# Altium PCB PCB1.PcbDoc
Units mm, origin at the board's own origin, x right, y up, seen from the top; angles counter-clockwise.
Board outline 99.82 x 81.91 mm, 2 copper layers (Top Layer, Bottom Layer); 32 components, 25 nets, 119 pads, 29 vias.
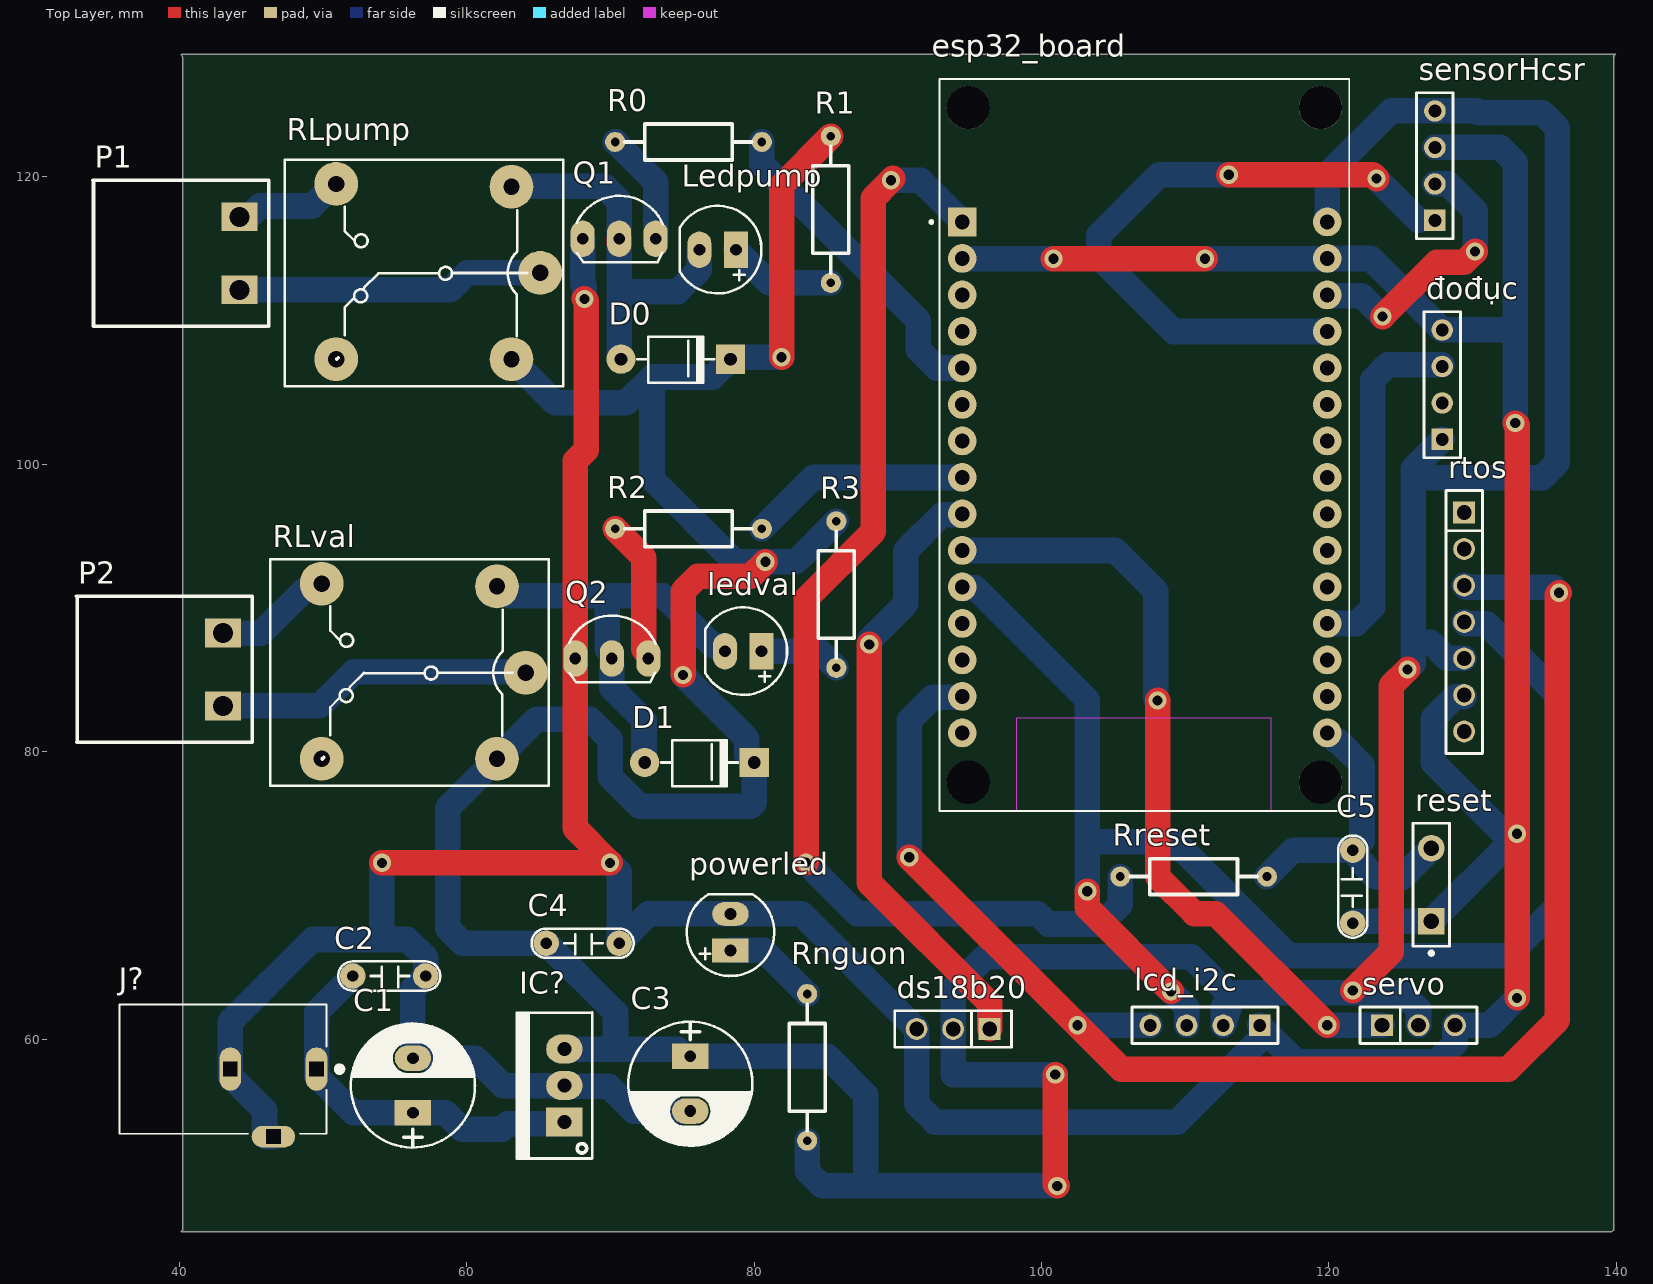
[diagram p0: Top Layer view]
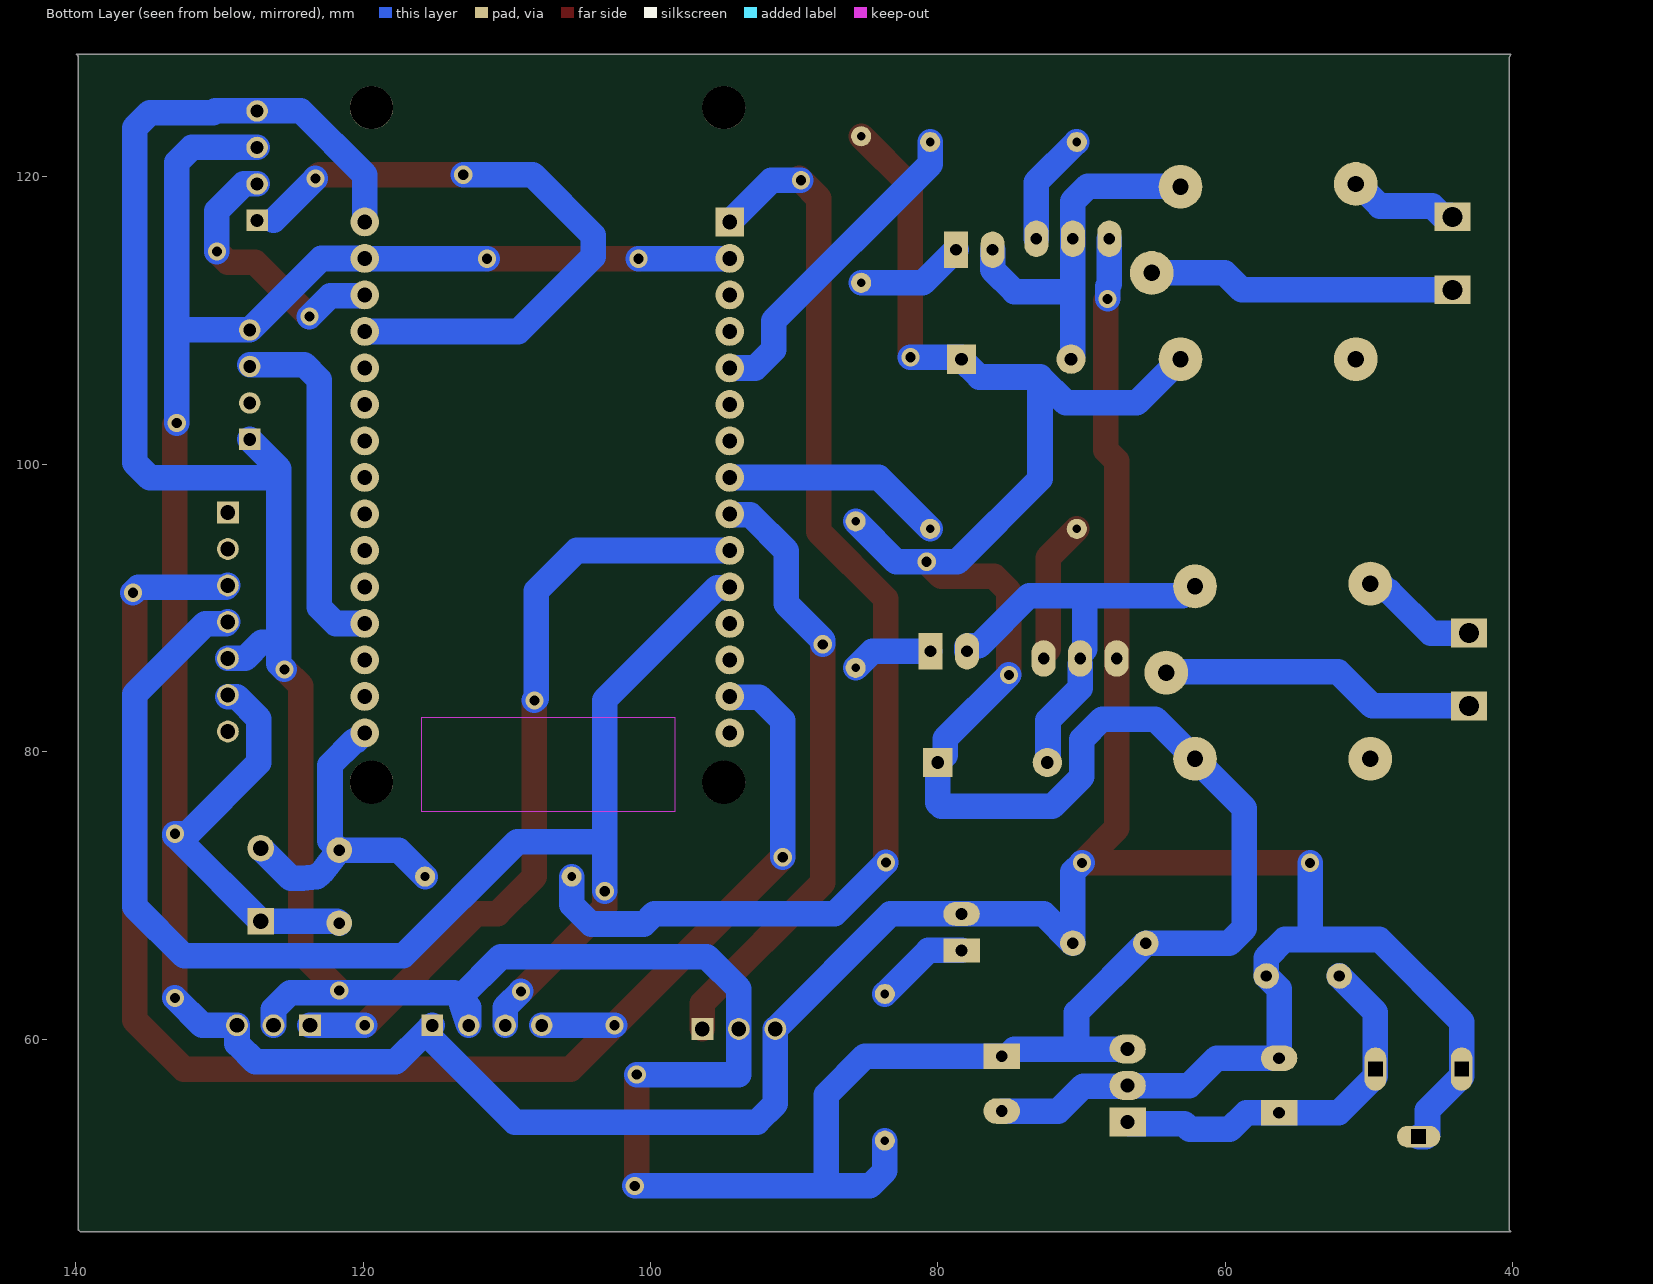
[diagram p1: Bottom Layer view, seen from below]

## Layer stack, top to bottom
Top Solder: solder mask 0.0102, Solder Resist, Dk 3.5
Top Layer: signal copper 0.0356
Dielectric 1: dielectric 0.32, FR-4, Dk 4.8
Bottom Layer: signal copper 0.0356
Bottom Solder: solder mask 0.0102, Solder Resist, Dk 3.5

## Board outline
40.259,128.27 40.259,46.736 40.132,46.609 139.7,46.609 139.827,46.736 139.827,128.397 139.954,128.524 40.132,128.524

## Design rules (kind name [scope] priority, off if disabled: settings)
Clearance [All] p1: gap=0.5 ignorepadtopadclearanceinfootprint=FALSE
PolygonConnect [All] p1: connectstyle=Relief reliefconductorwidth=0.254 reliefentries=4 polygonreliefangle="90 Angle" airgapwidth=0.254
RoutingVias [All] p1: holewidth=0.711 width=1.27 viastyle="Through Hole" minholewidth=0.711 minwidth=1.27 maxholewidth=0.711 maxwidth=1.27
SolderMaskExpansion [All] p1: expansion=0.102 istentingtop=FALSE
Width [All] p1: maxlimit=2.032 minlimit=1.524 preferedwidth=1.778 minimp=50.000000 maximp=50.000000 favimp=50.000000
30 further rules are at their usual default settings.

## Components (designator, comment, footprint, x,y, rotation, side; value= is the part's Value field where it differs from the comment)
C1 "1000uF/16V" CP1.5/3.4 56.261,54.864 r90 top
C2 "104" CN2 57.15,64.389 r180 top value=0.1uF
C3 "1000uF/16V" CP1.5/3.4 75.565,58.801 r270 top
C4 "104" CN2 70.612,66.675 r180 top value=0.1uF
C5 "104" CN2 121.666,68.072 r90 top value=0.1uF
D0 "100v" "DIODE 1A" 69.469,107.315 r180 top
D1 "100v" "DIODE 1A" 71.12,79.248 r180 top
ds18b20 "JP3" JP3-C1T 96.393,60.706 r180 top
esp32_board "ESP32-DEVKIT-V1" MODULE_ESP32_DEVKIT_V1 107.188,101.346 r0 top
IC? "LM7805" QTO-220 66.802,54.229 r90 top
J? "PJ-102A" CUI_PJ-102A 43.053,57.912 r180 top
lcd_i2c "Header 4" HDR1X4 115.189,60.96 r180 top
Ledpump "LED 5mm" LED-5MM-RED 78.74,114.935 r180 top
ledval "LED 5mm" LED-5MM-RED 80.518,86.995 r180 top
P1 "CON 2 EDG5.08" "CON 2 2EDG5.08" 44.196,112.141 r90 top
P2 "CON 2 EDG5.08" "CON 2 2EDG5.08" 43.053,83.185 r90 top
powerled "LED 5mm" LED-5MM-RED 78.359,66.167 r90 top
Q1 "C1815" TO92 70.612,115.697 r0 top value=C9014
Q2 "C1815" TO92 70.104,86.487 r0 top value=C9014
R0 "10K" "tro vach 1/4w" 75.438,122.428 r180 top
R1 "330" "tro vach 1/4w" 85.344,117.729 r270 top
R2 "10K" "tro vach 1/4w" 75.438,95.504 r180 top
R3 "330" "tro vach 1/4w" 85.725,90.932 r270 top
reset "SW-PB" SPST-2 127.127,70.739 r90 top
RLpump "Relay" "Relay 5 Chan SRD" 65.119,113.315 r180 top
RLval "Relay" "Relay 5 Chan SRD" 64.111,85.502 r180 top
Rnguon "220R" "tro vach 1/4w" 83.693,58.039 r270 top
Rreset "10k" "tro vach 1/4w" 110.593,71.311 r0 top
rtos "JP7" JP7-C1T 129.413,96.647 r270 top
sensorHcsr "Header 4" HDR1X4 127.381,116.967 r90 top
servo "JP3" JP3-C1T 123.698,60.96 r0 top
đođục "Header 4" HDR1X4 127.889,101.727 r90 top

## Footprints (in the part's own frame and the unit in brackets; to place one, negate y for a bottom-side part, rotate by r counter-clockwise, add the part's x,y. Pads: shape width x height; smd on the part's side, far side on the other; paste and mask are expansions set on the pad)
CN2 [mil]
  round 70 hole 31: 1(0,0) 2(200,0)
  silkscreen extent -40,-40 240,40, body extent -54,-44 260,55, height 407
"CON 2 2EDG5.08" [mm]
  rect 2x2.5 hole 1.4: 1(0,0) 2(5.08,0)
  silkscreen extent -2.54,-2.03 7.62,10.21, body extent -2.5,-1.75 7.58,10.25, height 3.15
CP1.5/3.4 [mil] "Tu hoa 220->470uF,16V, 470uF/16V,25V"
  rect 70x100 hole 32: 1(0,0)
  oval 70x100 hole 32: 2(150,0)
  silkscreen extent -95,-170 245,170, body extent -85,-157 230,157, height 446
CUI_PJ-102A [mm]
  oval 1.508x3.016 hole 1 square: 1(-6.5,0) 2(-0.5,0)
  oval 3.016x1.508 hole 1 square: 3(-3.5,4.7)
  silkscreen extent -8.3,-4.5 7.2,4.5, body extent -7.2,-4.5 7.2,4.9, height 11
"DIODE 1A" [mil] "Diode 1A"
  round 80 hole 35: 1(-50,0)
  rect 80x80 hole 35: 2(-350,0)
  silkscreen extent -305,-61 -95,65, body extent -366,-61 -34,65, height 122
HDR1X4 [mm] "Connector; Header; 4 Position"
  rect 1.5x1.5 hole 0.9: 1(0,0)
  round 1.5 hole 0.9: 2(2.54,0) 3(5.08,0) 4(7.62,0)
  silkscreen extent -1.27,-1.27 8.89,1.27
JP3-C1T [mm] "3 row, straight, gold plating"
  rect 1.52x1.52 hole 1.02: 1(0,0)
  round 1.52 hole 1.02: 2(2.54,0) 3(5.08,0)
  silkscreen extent -1.52,-1.27 6.6,1.27, body extent -1.52,-1.25 6.6,1.25, height 8.51
JP7-C1T [mm] "7 row, straight, gold plating"
  rect 1.52x1.52 hole 1.02: 1(0,0)
  round 1.52 hole 1.02: 2(2.54,0) 3(5.08,0) 4(7.62,0) 5(10.16,0) 6(12.7,0) 7(15.24,0)
  silkscreen extent -1.52,-1.27 16.76,1.27, body extent -1.52,-1.25 16.76,1.25, height 8.51
LED-5MM-RED [mil] "LED 2 PIN, 5 ly , Only colour,pin to pin 100mil"
  rect 65x100 hole 32: 1(0,0)
  oval 65x100 hole 32: 2(100,0)
  silkscreen extent -70,-120 154,120, body extent -65,-119 149,118, height 339
MODULE_ESP32_DEVKIT_V1 [mm]
  rect 2x2 / inner round 2 / far side rect 2x2 hole 1.02: 1(-12.7,15.515)
  round 2 hole 1.02: 2(-12.7,12.975) 3(-12.7,10.435) 4(-12.7,7.895) 5(-12.7,5.355) 6(-12.7,2.815) 7(-12.7,0.275) 8(-12.7,-2.265) 9(-12.7,-4.805) 10(-12.7,-7.345) 11(-12.7,-9.885) 12(-12.7,-12.425) 13(-12.7,-14.965) 14(-12.7,-17.505) 15(-12.7,-20.045) 16(12.7,-20.045) 17(12.7,-17.505) 18(12.7,-14.965) 19(12.7,-12.425) 20(12.7,-9.885) 21(12.7,-7.345) 22(12.7,-4.805) 23(12.7,-2.265) 24(12.7,0.275) 25(12.7,2.815) 26(12.7,5.355) 27(12.7,7.895) 28(12.7,10.435) 29(12.7,12.975) 30(12.7,15.515)
  round 3 hole 3 unplated: ""(-12.28,-23.475) ""(-12.28,23.475) ""(12.23,-23.475) ""(12.23,23.475)
  Keep-Out Layer region: 8.78,-25.475 -8.91,-25.475 -8.91,-18.985 8.78,-18.985
  Keep-Out Layer region: 8.78,-25.475 -8.91,-25.475 -8.91,-18.985 8.78,-18.985
  silkscreen extent -14.95,-25.47 14.23,25.47
QTO-220 [mil] "TO-220 - 1-2-3"
  rect 80x100 hole 39: 1(0,0)
  oval 80x100 hole 39: 2(100,0) 3(200,0)
  silkscreen extent -100,-76 300,130, body extent -119,-64 322,121, height 755
"Relay 5 Chan SRD" [mil] "Relay SPDT, 5 pin, 10A,W 650mil, L 800mil, H 800mil"
  round 120 hole 45: 1(0,0) 2(559.06,236.22) 3(559.06,-243.78) 4(78.74,-236.22) 5(78.74,236.22)
  silkscreen extent -63,-311 700,310, body extent -55,-306 697,304, height 602
SPST-2 [mm] "Switch; 2 Leads"
  rect 1.85x1.85 hole 1.1: 1(-2.54,0)
  round 1.85 hole 1.1: 2(2.54,0)
  silkscreen extent -4.89,-1.27 4.28,1.27
TO92 [mil] "TO-92"
  oval 66x100 hole 32: 1(-100,0) 2(0,0) 3(100,0)
  silkscreen extent -117,-65 120,118, body extent -109,-66 109,95, height 245
"tro vach 1/4w" [mm]
  round 1.4 hole 0.6: 1(-5.1,0) 2(5.1,0)
  silkscreen extent -4.39,-1.25 4.42,1.25, body extent -5.38,-1.2 5.38,1.2, height 2.41

## Part data
C1 C3: library part CP4, "Cap 1000uF/16V - 220uF/50V", Description 1="2200uF-3300uF/6,3V - 1000uF-2200uF/10V", Description 2="1000uF/16V - 470uF => 1000uF/25V - 100uF/100V", Description 3=330uF>470uF/35V_220uF>470uF/50V_10uF>22uF/250V, Description 4="220uF => 330uF/63V - 10uF =>33uF/160 - 200V", Description 5="4,7uF>10uF/250V_3,3uF>10uF/400V - 2,2uF>4,7uF/450V"
C2 C4 C5: library part CN2, "Cap np 104 => 105pF"
D0 D1: library part "Diode 1N4007", "Cắm", Chung_Loai=Cắm, Don_Vi=Con, Ma_Hang=MH001063, Ten_Linh_Kien="Diode 1N4007 1A (DIP)"
ds18b20 servo: "WR-PHD 2.54 mm Angled Socket Header", Manufacturer="W¨¹rth Elektronik eiSos GmbH", partNo=613003143121, ComponentLink1 Description=Manufacturer, ComponentLink1URL=http://www.we-online.com, ComponentLink2 Description=Datasheet, ComponentLink2URL=http://katalog.we-online.de/em/datasheet/6130xx143121.pdf, Created by="Karrer Zheng", Created Date="29 March 2013", NoPins=03
esp32_board: "Dual core, Wi-Fi: 2.4 GHz up to 150 Mbits/s,BLE (Bluetooth Low Energy) and legacy Bluetooth, 32 bits, Up to 240 MHz", Package=None, Availability="Not in stock", Check_prices=https://www.snapeda.com/parts/ESP32-DEVKIT-V1/Do+it/view-part/?ref=eda, MF="Do it", MP=ESP32-DEVKIT-V1, Price=None, SnapEDA_Link=https://www.snapeda.com/parts/ESP32-DEVKIT-V1/Do+it/view-part/?ref=snap
IC?: library part LM78xx, "On ap +, from + 5 to + 24VDC"
J?: "2.0 x 6.5 mm, 2.5 A, Horizontal, Through Hole, Tapered Pins, Dc Power Jack Connector", Package=None, Availability="In Stock", Check_prices=https://www.snapeda.com/parts/PJ-102A/CUI+Devices/view-part/?ref=eda, CUI_purchase_URL=https://www.cuidevices.com/product/interconnect/connectors/dc-power-connectors/jacks/pj-102a?utm_source=snapeda.com&utm_medium=referral&utm_campaign=snapedaBOM, MF="CUI Devices", MP=PJ-102A, Price=None, Purchase-URL=https://pricing.snapeda.com/search/part/PJ-102A/?ref=eda, SnapEDA_Link=https://www.snapeda.com/parts/PJ-102A/CUI+Devices/view-part/?ref=snap
lcd_i2c sensorHcsr đođục: "Header, 4-Pin", LatestRevisionDate=17-Jul-2002, LatestRevisionNote="Re-released for DXP Platform.", Publisher="Altium Limited"
Ledpump ledval powerled: library part "LED 5mm Do", "Cắm", Chung_Loai=Cắm, Don_Vi=Con, Ma_Hang=MH008967, Ten_Linh_Kien="Led 5MM Phủ Đỏ (1000c)"
P1 P2: "Cắm", Chung_Loai=Cắm, Don_Vi=Con, Ma_Hang=MH000759, Ten_Linh_Kien="CON 2 2EDG5.08-2P 5.08MM ( Xanh Cong)"
Q1 Q2: "NPN transistor"
R0 R1 R2 R3 Rnguon: library part "Tro Vach 1/4W 5% 220R", "Cắm", Chung_Loai=Cắm, Don_Vi=Con, Ma_Hang=MH007300, So_Chan=2, Ten_Linh_Kien="Trở Vạch 1/4w 5% 220R"
reset: "Switch", LatestRevisionDate=17-Jul-2002, LatestRevisionNote="Re-released for DXP Platform.", PackageDescription="Switch; 2 Leads", PackageReference=SPST-2, Published=24-Mar-1999, Publisher="Altium Limited"
RLpump RLval: library part "Relay 5 Chan SRD", "Relay 5 Chan", Ma_Hang=MH009374, Ten="Relay 5V10A SRD-05VDC-SL-C Chính Hãng"
Rreset: library part "Tro Vach 1/4W 5% 1k", "Cắm", Chung_Loai=Cắm, Don_Vi=Con, Ma_Hang=MH007390, So_Chan=2, Ten_Linh_Kien="Trở Vạch 1/4w 5% 1k"
rtos: "WR-PHD 2.54 mm Angled Socket Header", Manufacturer="W¨¹rth Elektronik eiSos GmbH", partNo=613007143121, ComponentLink1 Description=Manufacturer, ComponentLink1URL=http://www.we-online.com, ComponentLink2 Description=Datasheet, ComponentLink2URL=http://katalog.we-online.de/em/datasheet/6130xx143121.pdf, Created by="Karrer Zheng", Created Date="29 March 2013", NoPins=07

## Via types
v1: diameter 1.27, hole 0.711, Top Layer to Bottom Layer, 29 vias

## Nets (pads, with @x,y where several pads share a name; then routed paths per layer and width w, separated by ;. In a path a pad name is that pad's centre, name@x,y a point inside that pad or via, vN(x,y) a via of type N, cw(c..) or ccw(c..) an arc to the next point about the centre after c; other vN are vias at no path point)
4: esp32_board.5 R0.1 | length 22.5
  Bottom Layer w1.778: R0.1 80.538,120.884 91.44,109.982 91.44,107.971 92.71,106.701 esp32_board.5
5: esp32_board.8 R2.1 | length 15.4
  Bottom Layer w1.778: R2.1 84.115,99.081 esp32_board.8
18: ds18b20.1 esp32_board.9 | length 42.9
  Top Layer w1.778: v1(88.011,87.468) 88.011,70.884 96.393,62.502 ds18b20.1 ; esp32_board.9@94.446,96.499 esp32_board.9
  Bottom Layer w1.778: v1(88.011,87.468) 88.011,87.757 90.551,90.297 90.551,93.98 93.07,96.499 94.446,96.499 esp32_board.9
19: esp32_board.10 servo.1 | length 54.5
  Top Layer w1.778: v1(108.077,83.566) 108.077,71.298 110.643,68.733 112.115,68.733 v1(119.888,60.96)
  Bottom Layer w1.778: esp32_board.10 105.135,94.001 107.95,91.186 107.95,83.693 v1(108.077,83.566) ; v1(119.888,60.96) servo.1
34: esp32_board.19 đođục.3 | length 24.7
  Bottom Layer w1.778: esp32_board.19 121.92,88.921 123.063,90.064 123.063,105.892 124.105,106.934 đođục.3@127.889,106.934
+3.3: esp32_board.1 Rreset.1 | length 82.4
  Top Layer w1.778: v1(83.617,72.288) 83.617,90.627 88.29,95.301 88.29,118.516 v1(89.535,119.761) v1@89.662,119.888
  Bottom Layer w1.778: v1(83.617,72.288) 87.173,68.732 99.735,68.732 100.457,68.01 104.14,68.01 105.493,69.363 Rreset.1 ; v1(89.535,119.761) 91.588,119.761 esp32_board.1
+5: C3.1 C4.2 D0.2 D1.2 ds18b20.2 esp32_board.30 IC?.3 lcd_i2c.2 R1.1 R3.1 RLpump.5 RLval.5 Rnguon.2 rtos.5 sensorHcsr.4 servo.2 đođục.1 | length 347.2
  Top Layer w1.778: v1(75.057,85.344) 75.057,91.16 76.099,92.202 79.771,92.202 v1(80.787,93.218) ; v1(81.915,107.442) 81.915,119.4 R1.1 ; v1(100.965,57.531) 100.965,49.911 v1(101.092,49.784) ; v1(121.666,63.373) 124.333,66.04 124.333,84.582 v1(125.476,85.725)
  Bottom Layer w1.778: RLpump.5 66.155,104.279 71.104,104.279 72.898,106.073 ; IC?.3 70.358,59.309 ; v1(75.057,85.344) 79.502,80.899 79.502,79.756 D1.2 80.01,76.454 79.756,76.2 72.037,76.2 69.985,78.252 69.985,80.866 68.58,82.271 64.88,82.271 58.682,76.073 58.682,67.717 59.724,66.675 C4.2 70.358,61.849 70.358,59.309 ; D0.2 77.117,106.073 72.898,106.073 ; D0.2@78.359,107.442 v1(81.915,107.442) ; Rnguon.2 83.693,50.826 84.735,49.784 87.757,49.784 ; R3.1 82.911,93.218 v1(80.787,93.218) 78.664,93.218 72.898,98.984 72.898,106.073 ; v1(100.965,57.531) 93.853,57.531 ds18b20.2 93.853,63.5 96.085,65.732 110.417,65.732 113.284,62.865 ; v1(101.092,49.784) 87.757,49.784 ; esp32_board.30 119.888,120.142 124.333,124.587 sensorHcsr.4 130.302,124.587 130.429,124.46 134.848,124.46 135.89,123.418 135.89,100.102 134.848,99.06 126.873,99.06 ; v1(125.476,85.725) 125.857,86.106 125.857,87.63 ; servo.2 126.238,62.077 125.077,63.238 113.657,63.238 113.284,62.865 ; đođục.1 125.857,99.695 125.857,87.63 ; rtos.5 128.206,86.487 127.063,87.63 125.857,87.63 ; 70.358,59.309 74.676,59.309 75.184,58.801 C3.1 85.09,58.801 87.757,56.134 87.757,49.784 ; 113.284,62.865 113.03,62.103 lcd_i2c.2 112.649,62.23 113.284,62.865
+12: C1.1 C2.2 IC?.1 J?.1 | length 27
  Bottom Layer w1.778: C2.2 49.553,61.872 J?.1 49.553,57.428 52.117,54.864 C1.1 58.547,54.864 59.69,53.721 62.484,53.721 62.865,54.102 66.675,54.102 IC?.1
ECHO: esp32_board.27 sensorHcsr.1 | length 44.8
  Top Layer w1.778: v1(113.03,120.142) 123.063,120.142 v1(123.317,119.888)
  Bottom Layer w1.778: v1(113.03,120.142) 108.204,120.142 103.987,115.925 103.987,114.453 109.199,109.241 esp32_board.27 ; v1(123.317,119.888) 126.238,116.967
EN: C5.2 esp32_board.16 reset.2 Rreset.2 | length 23.5
  Bottom Layer w1.778: Rreset.2 117.534,73.152 C5.2 ; esp32_board.16 119.948,81.301 120.489,80.76 120.615,80.76 122.307,79.068 122.307,73.793 C5.2 ; reset.2 125.035,71.187 124.189,71.187 123.219,71.306 122.903,71.568 C5.2
GND: C1.2 C2.1 C3.2 C4.1 C5.1 ds18b20.3 esp32_board.2 esp32_board.29 IC?.2 J?.2 J?.3 lcd_i2c.1 powerled.2 Q1.1 Q2.1 reset.1 rtos.6 sensorHcsr.3 servo.3 đođục.4 | length 338.1
  Top Layer w1.778: v1(54.102,72.263) v1(69.977,72.263) 67.564,74.676 Q2.1 67.564,100.228 68.326,100.99 68.326,111.379 v1(68.199,111.506) ; v1(100.838,114.3) v1(111.379,114.3) ; v1(132.969,102.87) 133.096,102.743 v1(133.096,62.865)
  Bottom Layer w1.778: J?.3 46.069,53.212 45.934,53.347 45.934,55.047 43.553,57.428 J?.2 43.553,61.206 49.276,66.929 53.721,66.929 ; v1(54.102,72.263) 54.102,67.31 53.721,66.929 ; Q1.1 68.072,112.522 68.199,112.395 v1(68.199,111.506) ; v1(69.977,72.263) 70.612,71.628 C4.1 72.644,68.707 83.312,68.707 ds18b20.3 91.313,55.499 92.583,54.229 109.446,54.229 lcd_i2c.1@115.683,60.466 ; C3.2 71.628,54.991 69.899,56.72 66.851,56.72 IC?.2 62.513,56.769 60.608,58.674 C1.2 56.261,63.5 C2.1 57.15,65.659 55.88,66.929 53.721,66.929 ; esp32_board.2 94.509,114.3 v1(100.838,114.3) ; v1(111.379,114.3) 119.867,114.3 esp32_board.29 122.915,114.321 đođục.4 132.588,109.347 132.969,108.966 ; lcd_i2c.1 lcd_i2c.1@115.683,60.466 ; C5.1 121.793,68.199 reset.1 132.715,73.787 133.096,74.168 v1(133.096,74.295) 132.207,74.295 127.264,79.238 127.264,82.297 128.787,83.82 rtos.6@129.413,83.82 ; sensorHcsr.3 131.927,122.047 132.969,121.005 132.969,108.966 ; v1(132.969,102.87) 132.969,108.966 ; v1(133.096,62.865) 131.191,60.96 servo.3 128.778,59.69 127.508,58.42 117.729,58.42 lcd_i2c.1@115.683,60.466
NetD0_1: D0.1 Ledpump.2 Q1.2 RLpump.4 | length 26.9
  Top Layer w1.778: Q1.2@70.612,115.367 Q1.2
  Bottom Layer w1.778: RLpump.4 63.151,119.348 69.57,119.348 70.612,118.306 70.612,112.141 70.739,112.014 ; D0.1 70.739,107.384 70.612,107.511 70.612,111.887 70.739,112.014 ; Ledpump.2 76.2,113.538 74.676,112.014 70.739,112.014
NetD1_1: D1.1 ledval.2 Q2.2 RLval.4 | length 29.8
  Bottom Layer w1.778: RLval.4@62.225,91.598 62.956,90.867 69.791,90.867 ; Q2.2@70.053,86.868 69.791,87.13 69.791,90.867 ; Q2.2@70.104,86.106 70.104,84.429 72.341,82.192 72.341,79.297 D1.1 ; ledval.2 77.978,87.312 77.915,87.376 77.151,87.376 73.66,90.867 69.791,90.867
NetLedpump_1: Ledpump.1 R1.2 | length 7.6
  Bottom Layer w1.778: Ledpump.1 81.046,112.629 R1.2
Netledval_1: ledval.1 R3.2 | length 5.6
  Bottom Layer w1.778: ledval.1@80.581,86.995 84.562,86.995 R3.2
NetP1_1: P1.2 RLpump.3 | length 7.7
  Bottom Layer w1.778: P1.2 44.307,117.332 44.959,117.332 45.599,117.972 49.242,117.972 50.777,119.507 RLpump.3
NetP1_2: P1.1 RLpump.1 | length 21.4
  Bottom Layer w1.778: P1.1 58.873,112.141 60.047,113.315 RLpump.1
NetP2_1: P2.2 RLval.3 | length 7.9
  Bottom Layer w1.778: P2.2 43.078,88.24 45.695,88.24 48.61,91.155 48.702,91.155 RLval.3@49.403,91.856
NetP2_2: P2.1 RLval.1 | length 22.1
  Bottom Layer w1.778: P2.1 49.784,83.185 52.149,85.55 64.063,85.55 RLval.1
Netpowerled_1: powerled.1 Rnguon.1 | length 6.6
  Bottom Layer w1.778: powerled.1 80.665,66.167 Rnguon.1
NetQ1_3: Q1.3 R0.2 | length 7.9
  Bottom Layer w1.778: R0.2 70.358,122.428 73.152,119.634 Q1.3
NetQ2_3: Q2.3 R2.2 | length 9.6
  Top Layer w1.778: R2.2 72.331,93.511 72.331,87.13 Q2.3@72.593,86.868
scl: esp32_board.14 lcd_i2c.4 rtos.3 | length 108.2
  Top Layer w1.778: v1(90.805,72.654) v1(102.499,60.96) 105.547,57.912 132.486,57.912 135.89,61.316 135.89,90.932 v1(136.017,91.059) ; esp32_board.14@94.446,83.799 esp32_board.14
  Bottom Layer w1.778: v1(90.805,72.654) 90.805,82.169 92.435,83.799 94.446,83.799 esp32_board.14 ; v1(102.499,60.96) lcd_i2c.4 ; rtos.3 129.54,91.44 135.636,91.44 v1(136.017,91.059)
sda: esp32_board.11 lcd_i2c.3 rtos.4 | length 98.2
  Top Layer w1.778: v1(103.194,70.288) 103.194,69.145 v1(109.021,63.318)
  Bottom Layer w1.778: esp32_board.11 94.53,91.419 95.369,91.419 103.194,83.594 103.194,73.739 ; v1(103.194,70.288) 103.194,73.739 ; v1(109.021,63.318) 110.109,62.23 lcd_i2c.3 ; rtos.4 129.54,88.9 130.984,88.9 135.89,83.994 135.89,69.215 132.461,65.786 117.221,65.786 109.268,73.739 103.194,73.739
TRIG: esp32_board.28 sensorHcsr.2 | length 19.2
  Top Layer w1.778: v1(123.738,110.276) 127.508,114.046 129.413,114.046 v1(130.175,114.808)
  Bottom Layer w1.778: esp32_board.28 119.93,111.739 122.276,111.739 v1(123.738,110.276) ; sensorHcsr.2 128.305,119.507 130.175,117.637 v1(130.175,114.808)
pads on no net: esp32_board. esp32_board.3 esp32_board.4 esp32_board.6 esp32_board.7 esp32_board.12 esp32_board.13 esp32_board.15 esp32_board.17 esp32_board.18 esp32_board.20 esp32_board.21 esp32_board.22 esp32_board.23 esp32_board.24 esp32_board.25 esp32_board.26 RLpump.2 RLval.2 rtos.1 rtos.2 rtos.7 đođục.2